# Altium PCB pcb.PcbDoc
Units mm, origin at the board's own origin, x right, y up, seen from the top; angles counter-clockwise.
Board outline 88.5 x 15 mm, 2 copper layers (Top Layer, Bottom Layer); 9 components, 8 nets, 50 pads, 10 vias.
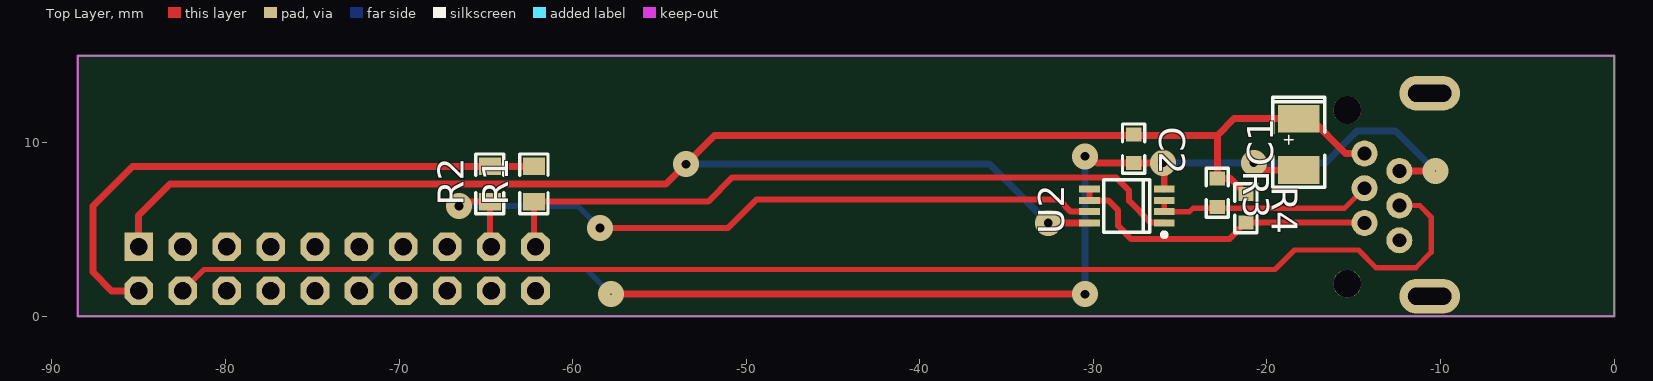
[diagram p0: Top Layer view]
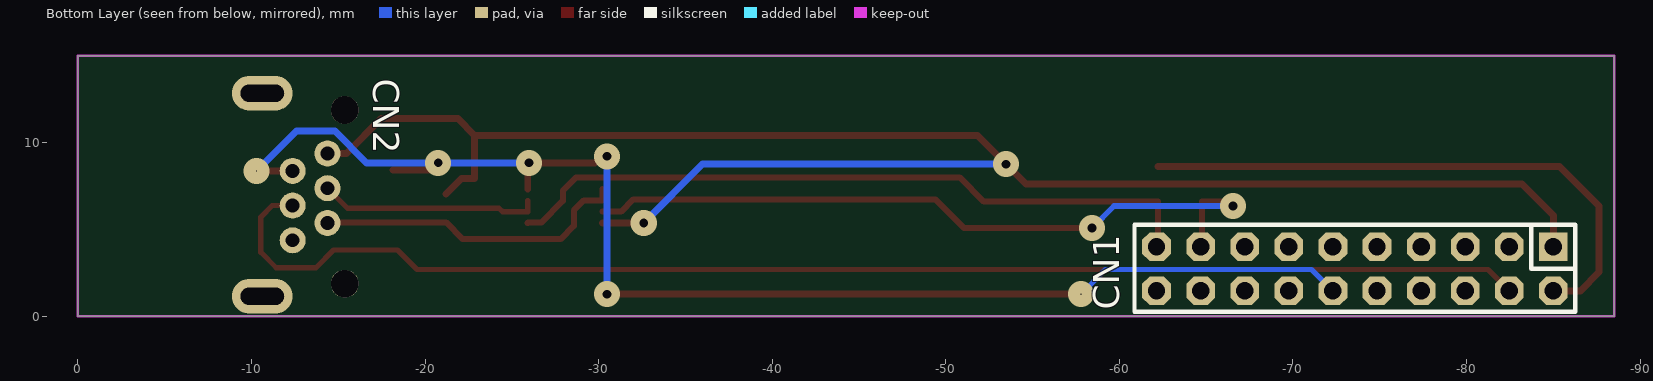
[diagram p1: Bottom Layer view, seen from below]
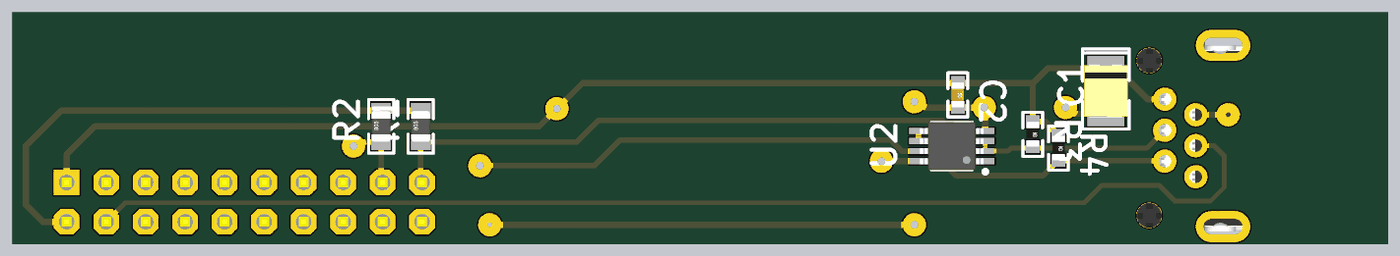
[diagram p2: 3D render of the assembled board from above, using the file's embedded part models]

## Layer stack, top to bottom
Top Solder: solder mask 0.0102, Solder Resist, Dk 3.5
Top Layer: signal copper 0.0356
Dielectric1: dielectric 0.32, FR-4, Dk 4.8
Bottom Layer: signal copper 0.0356
Bottom Solder: solder mask 0.0102, Solder Resist, Dk 3.5

## Board outline
-88.5,0 0,0 0,15 -88.5,15

## Design rules (kind name [scope] priority, off if disabled: settings)
Clearance [All] p1: gap=0.254
FabricationTestPointUsage TestPointUsage [All] p1: valid=0 allowmultiple=FALSE
FabricationTestpoint Testpoint [All] p1: side=3 testpointundercomponent=TRUE minsize=1.016 maxsize=2.54 preferedsize=1.524 minholesize=0 maxholesize=1.016 preferedholesize=0.813 testpointgrid=0.025 allowsidetop=TRUE allowsidebottom=TRUE usegrid=TRUE gridtolerance=0
PolygonConnect [All] p1: connectstyle=Relief reliefconductorwidth=0.254 reliefentries=4 polygonreliefangle="90 Angle" airgapwidth=0.254
RoomDefinition sch [InComponentClass('sch')] p1: confinementstyle=ConfineIn formatcopy=TRUE lockcomponents=FALSE outline -116.484,-27.127 97.003,-27.127 97.003,65.532 -116.484,65.532
RoutingVias [All] p1: holewidth=0.5 width=1.5 viastyle="Through Hole" minholewidth=0.5 minwidth=1.5 maxholewidth=0.5 maxwidth=1.5
SolderMaskExpansion [All] p1: expansion=0.102
Width [All] p1: maxlimit=0.5 minlimit=0.3 preferedwidth=0.4
28 further rules are at their usual default settings.

## Components (designator, comment, footprint, x,y, rotation, side; value= is the part's Value field where it differs from the comment)
C1 "" SMDB -18.161,9.906 r90 top
C2 "100nF" C0603 -27.686,9.652 r270 top
CN1 "CN_10x2" GP_10x2 -85,4 r0 bottom
CN2 "IEEE1394" A-IEE-DIP-C -13,7 r270 bottom
R1 "4k3" R0805 -62.23,7.62 r90 top
R2 "4k3" R0805 -64.77,7.62 r90 top
R3 "4k3" R0603 -22.86,7.112 r270 top
R4 "4k3" R0603 -21.209,6.223 r270 top
U2 "P82B96DP" TSSOP8N -28.067,6.35 r90 top

## Footprints (in the part's own frame and the unit in brackets; to place one, negate y for a bottom-side part, rotate by r counter-clockwise, add the part's x,y. Pads: shape width x height; smd on the part's side, far side on the other; paste and mask are expansions set on the pad)
A-IEE-DIP-C [mm] "IEEE1394 vertical DIP connector"
  round 1.5 hole 0.8: 1(-2.375,1.375) 2(-1.375,-0.625) 3(-0.375,1.375) 4(0.625,-0.625) 5(1.625,1.375) 6(2.625,-0.625)
  round 1.6 hole 1.6: M1(-4.875,2.375) M2(5.125,2.375)
  oval 2x3.5 hole 1 slot 2.5 at 90 deg: M3(-5.85,-2.375) M4(5.85,-2.375)
  body extent -6.6,-13 6.9,3.2, height 8.7
C0603 [mil]
  rect 32x35 smd: 1(32,0) 2(-32,0)
  silkscreen extent -56,-25 56,25, body extent -31,-16 32,16, height 12
GP_10x2 [mil]
  rect 65x65 hole 39.37: 1(0,0)
  oct 65x65 hole 39.37: 2(0,100) 3(100,0) 4(100,100) 5(200,0) 6(200,100) 7(300,0) 8(300,100) 9(400,0) 10(400,100) 11(500,0) 12(500,100) 13(600,0) 14(600,100) 15(700,0) 16(700,100) 17(800,0) 18(800,100) 19(900,0) 20(900,100)
  silkscreen extent -50,-50 950,147, body extent -50,-50 950,150, height 330
R0603 [mil]
  rect 32x35 smd: 1(32,0) 2(-32,0)
  silkscreen extent -56,-25 56,25, body extent -31,-16 32,16, height 12
R0805 [mil]
  rect 40x50 smd: 1(-40,0) 2(40,0)
  silkscreen extent -68,-32 68,32, body extent -39,-25 39,25, height 31
SMDB [mm] "SMDB"
  rect 1.6x2.4 smd: 1(1.476,0) 2(-1.475,0)
  silkscreen extent -2.46,-1.5 2.72,1.5, body extent -1.75,-1.4 1.75,1.4, height 1.91
TSSOP8N [mm]
  rect 0.4x1.2 smd: 1(-0.975,-2.15) 2(-0.325,-2.15) 3(0.325,-2.15) 4(0.975,-2.15) 5(0.975,2.15) 6(0.325,2.15) 7(-0.325,2.15) 8(-0.975,2.15)
  silkscreen extent -1.77,-2.27 1.52,1.33, body extent -1.55,-2.05 1.55,2.05, height 1.1

## Part data
C1: library part "Cap Pol Tant", "Polarized Tantalum Capacitor"
C2: library part Cap, "Capacitor"
R1 R2 R3 R4: library part Res, "Resistor"
U2: "Dual Bidirectional I2C Bus Buffer, TSSOP8 Package"

## Via types
v1: diameter 1.5, hole 0.5, Top Layer to Bottom Layer, 8 vias
v2: diameter 1.5, hole 0, Top Layer to Bottom Layer, 2 vias

## Nets (pads, with @x,y where several pads share a name; then routed paths per layer and width w, separated by ;. In a path a pad name is that pad's centre, name@x,y a point inside that pad or via, vN(x,y) a via of type N, cw(c..) or ccw(c..) an arc to the next point about the centre after c; other vN are vias at no path point)
3V3: CN1.2 R1.2 R2.2 | length 33.2
  Top Layer w0.4: CN1.2 -86.55,1.46 -87.63,2.54 -87.63,6.35 -85.344,8.636 R2.2 R1.2
5V: C1.1 C2.2 CN1.1 CN2.1 R3.2 R4.2 U2.8 | length 104.7
  Top Layer w0.4: CN1.1 -85,5.805 -83.185,7.62 -54.61,7.62 v1(-53.467,8.763) -51.816,10.414 -22.86,10.414 ; v1(-32.598,5.375) U2.8 ; R4.2 -22.098,7.925 R3.2 -22.86,10.414 ; CN2.1 -15.471,9.375 -17.478,11.382 C1.1 -21.892,11.382 -22.86,10.414
  Bottom Layer w0.4: v1(-53.467,8.763) -35.986,8.763 v1(-32.598,5.375)
GND: C1.2 C2.1 CN1.12 CN2.2 U2.4 | length 79.2
  Top Layer w0.4: v2(-57.785,1.27) v1(-30.48,1.27) ; v1(-30.48,9.21) -30.165,9.21 -29.794,8.839 C2.1 v1(-25.984,8.839) ; U2.4 v1@-25.917,8.772 ; v1(-20.752,8.839) -20.343,8.431 C1.2 ; CN2.2 v2(-10.294,8.375)
  Bottom Layer w0.3: CN1.12 -71.071,2.689 -59.204,2.689 v2(-57.785,1.27)
  Bottom Layer w0.4: v1(-30.48,1.27) v1(-30.48,9.21) ; v1(-25.984,8.839) v1(-20.752,8.839) -16.637,8.839 -14.809,10.668 -12.587,10.668 v2(-10.294,8.375)
HV_SCL: CN2.5 R4.1 U2.5 U2.6 | length 18.4
  Top Layer w0.35: U2.5 U2.6 -29.154,6.675 -28.575,6.096 -28.575,5.207 -27.813,4.445 -22.174,4.445 R4.1 -14.41,5.41 CN2.5
HV_SDA: CN2.3 R3.1 U2.2 U2.3 | length 12.8
  Top Layer w0.3: U2.3 U2.2 -24.455,6.025 -24.257,6.223 -24.255,6.221 -15.529,6.221 CN2.3
IRQ: CN1.4 CN2.4 | length 77.8
  Top Layer w0.3: CN1.4 -81.231,2.689 -19.536,2.689 -18.415,3.81 -14.732,3.81 -13.716,2.794 -11.43,2.794 -10.541,3.683 -10.541,5.715 -11.201,6.375 CN2.4
SCL: CN1.17 R2.1 U2.7 | length 42.2
  Top Layer w0.35: v1(-66.548,6.35) -66.294,6.604 R2.1 CN1.17@-64.77,4.09 ; v1(-58.42,5.08) -51.054,5.08 -49.403,6.731 -32.004,6.731 -31.298,6.025 U2.7
  Bottom Layer w0.35: v1(-66.548,6.35) -59.69,6.35 v1(-58.42,5.08)
SDA: CN1.19 R1.1 U2.1 | length 40.8
  Top Layer w0.35: CN1.19@-62.23,4.09 R1.1 -52.197,6.604 -50.8,8.001 -28.702,8.001 -27.94,7.239 -27.94,6.641 -26.695,5.396 -25.938,5.396 U2.1
pads on no net: CN1.3 CN1.5 CN1.6 CN1.7 CN1.8 CN1.9 CN1.10 CN1.11 CN1.13 CN1.14 CN1.15 CN1.16 CN1.18 CN1.20 CN2.6 CN2.M1 CN2.M2 CN2.M3 CN2.M4

## Keep-outs
Keep-Out Layer:
  the board outline again, w0.15

## Silkscreen, mask and mechanical layers (free items; w line width, h text height)
Mechanical 16:
  lines w0.127: -165.94,-35.777 -160.86,-35.777 ; -165.94,12.483 -160.86,12.483 ; -165.94,60.743 -160.86,60.743 ; -92.915,-84.037 -92.915,-78.957 ; -92.915,103.923 -92.915,109.003 ; -28.78,-78.957 6.78,-78.957 121.08,-78.957 ; -19.89,-84.037 -19.89,-78.957 ; -19.89,103.923 -19.89,109.003 ; 1.166,-78.932 1.192,-78.957 ; 16.002,-78.943 16.002,-55.855 121.072,-55.855 ; 16.027,-63.373 121.047,-63.373 ; 16.052,-71.349 121.047,-71.349 ; 34.983,-78.943 34.983,-71.349 ; 35.002,-75.362 121.047,-75.362 ; 53.135,-84.037 53.135,-78.957 ; 53.135,103.923 53.135,109.003 ; 66.523,-78.892 66.523,-71.374 ; 95.452,-71.349 95.452,-55.855 ; 110.477,-63.373 110.477,-55.858 ; 121.08,-35.777 126.16,-35.777 ; 121.08,12.483 126.16,12.483 ; 121.08,60.743 126.16,60.743 ; 121.08,-78.957 -160.86,-78.957 -160.86,103.923 121.08,103.923 121.08,-53.684 121.08,-78.957 ; -165.94,-84.037 126.16,-84.037 126.16,109.003 -165.94,109.003 -165.94,-84.037
  text "1" at -129.694,105.574 h1.78
  text "2" at -57.05,105.574 h1.78
  text "3" at 16.102,105.574 h1.78
  text "4" at 89,105.574 h1.78
  text "A" at -164.035,82.562 h1.78
  text "A" at 122.985,82.562 h1.78
  text "B" at -164.035,34.505 h1.78
  text "B" at 122.985,34.505 h1.78
  text "C" at -164.035,-14.009 h1.78
  text "C" at 122.985,-14.009 h1.78
  text "PROJECT NAME:" at 16.916,-57.861 h1.14
  text "REVISION:" at 96.367,-57.861 h1.14
  text "A4" at 113.827,-60.933 h2.29
  text "Project_Name" at 41.503,-61.265 h2.54
  text "0.0.0" at 99.652,-61.708 h1.78
  text "D" at -164.035,-62.015 h1.78
  text "D" at 122.985,-62.015 h1.78
  text "PROJECT NUMBER:" at 96.342,-65.38 h1.14
  text "TITLE:" at 16.891,-65.456 h1.14
  text "PCB_TITLE" at 46.71,-69.418 h2.16
  text "ONW-000" at 103.828,-69.557 h1.78
  text "DATE:" at 17.018,-73.558 h1.14
  text "NAME_1" at 84.786,-74.042 h1.52
  text "X" at 46.205,-74.117 h1.52
  text "DRAWN BY:" at 67.59,-74.118 h1.52
  text "of" at 49.888,-74.193 h1.52
  text "Y" at 54.308,-74.193 h1.52
  text "SHEET" at 36.426,-74.219 h1.52
  text "DD-MM-YYYY" at 18.186,-77.673 h1.52
  text "NAME_2" at 84.811,-77.674 h1.52
  text "CHECKED BY:" at 67.565,-77.801 h1.52
  text ".PCB_FILE_NAME_NO_PATH" at 36.325,-77.826 h1.52
  text "1" at -129.694,-82.386 h1.78
  text "2" at -57.05,-82.386 h1.78
  text "3" at 16.102,-82.386 h1.78
  text "4" at 89,-82.386 h1.78